# EAGLE board brd BEL RUMAH (EAGLE 7.5.0)
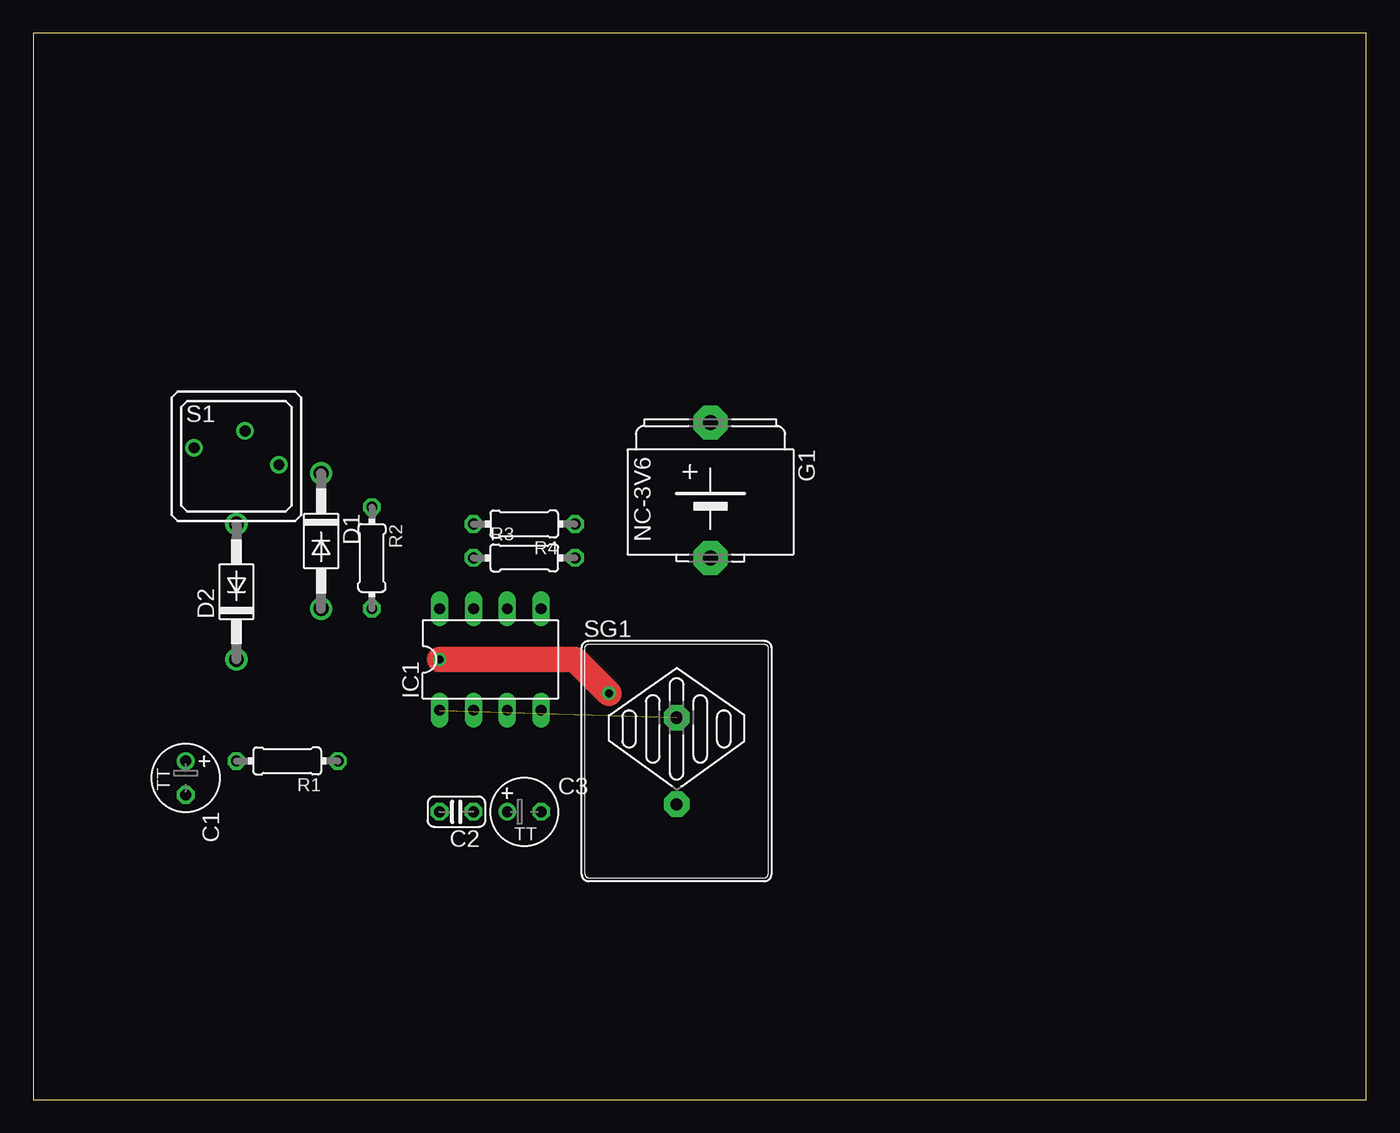
[diagram p0: board, top side]
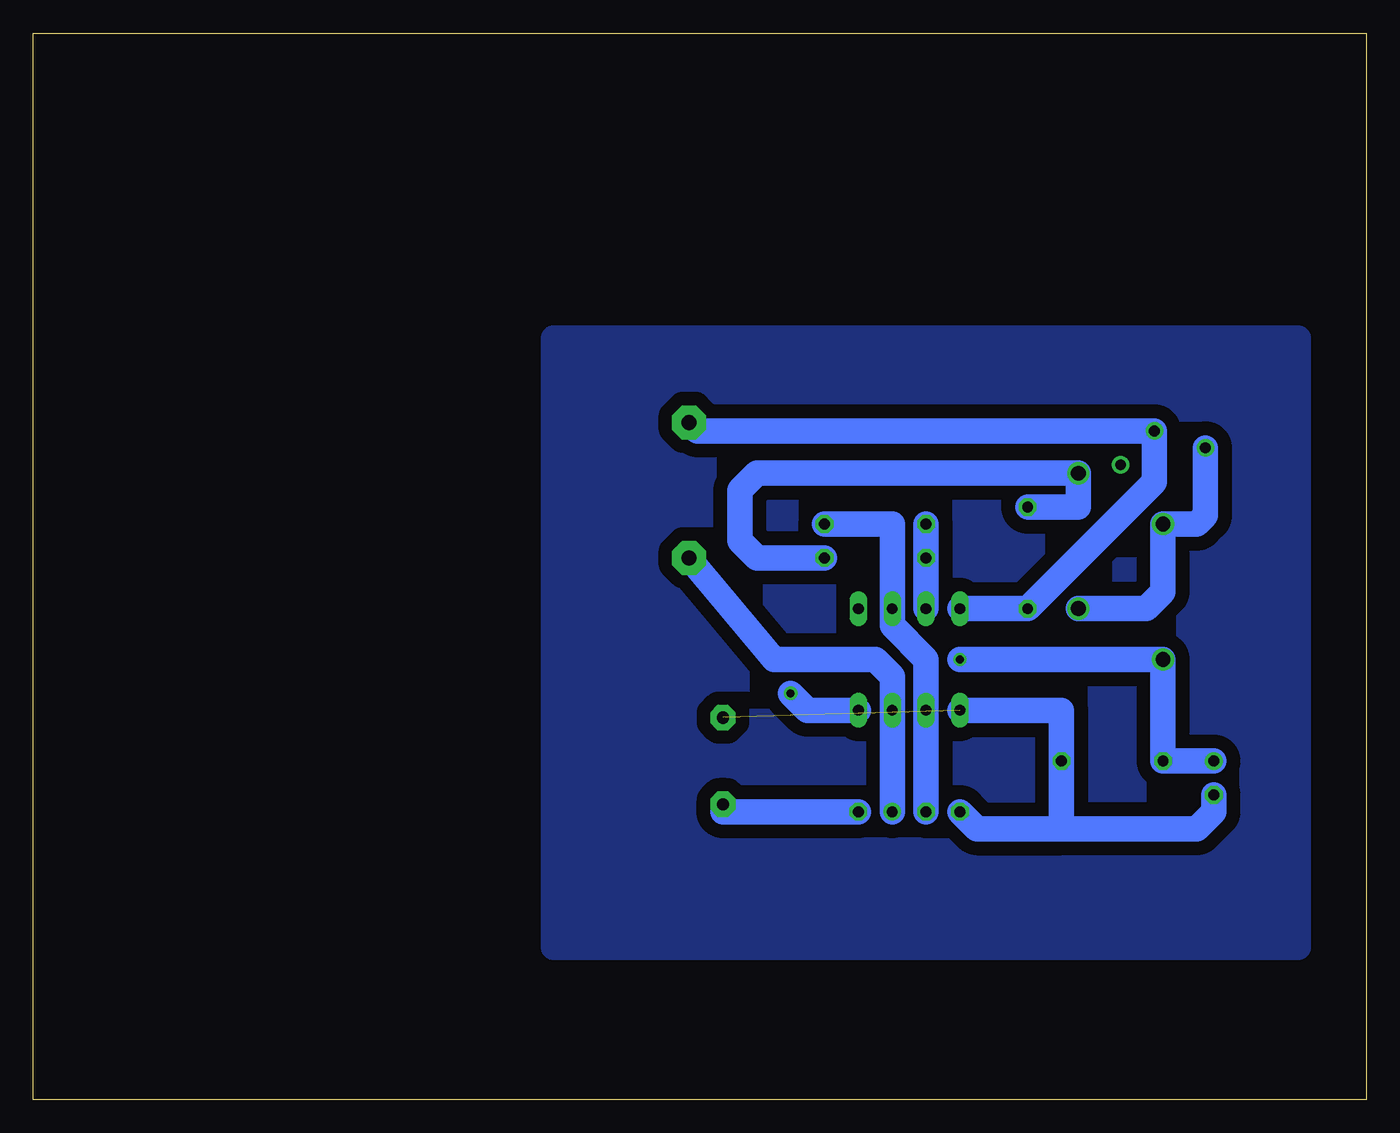
[diagram p1: board, bottom side, seen from below]

Size 100 x 80 mm. Coordinates in mm from the lower left corner, seen from the top.
Outline: 0,0 100,0 100,80 0,80 0,0
Copper layers (1*16): Top 0.035mm / dielectric 1.5mm / Bottom 0.035mm
Design rules "default *": minimum track width 10mil, minimum drill 24mil, track to track 40mil, track to pad 6mil, pad to pad 6mil, via to via 6mil, smd to smd 6mil, copper to edge 40mil, drill to drill 8mil, minimum pad ring 10mil, minimum via ring 8mil, stop-mask expansion 4mil, vias tented up to drill 0mil, thermal gap 10mil

## Footprints (pad centres in the part's own frame; a part is rotated, then mirrored left to right if it is on the bottom)
TT2D5 = drill 0.813: + -1.27,0 | drill 0.813 octagon: - 1.27,0
C025-024X044 = drill 0.813 octagon: 1 -1.27,0; 2 1.27,0
DO41-10 = drill 1.118: A 5.08,0; C -5.08,0
3V11R = drill 1.118 pad 2.54 octagon: + -5.08,0; - 5.08,0
DIL08 = drill 0.813 long: 1 -3.81,-3.81; 2 -1.27,-3.81; 3 1.27,-3.81; 4 3.81,-3.81; 5 3.81,3.81; 6 1.27,3.81; 7 -1.27,3.81; 8 -3.81,3.81
0204/7 = drill 0.813 octagon: 1 -3.81,0; 2 3.81,0
RDT1034 = drill 0.8: A 3.175,-0.635; A1 -3.175,0.635; B 0.65,1.9
F/SMX = drill 0.914 pad 1.905 octagon: 1 0,-3.251; 2 0,3.251

## Placement (x,y rotation side)
C1  4.7 uF  [TT2D5]  11.43,24.13 270 top
C2  22 nF  [C025-024X044]  31.75,21.59 180 top
C3  100uF  [TT2D5]  36.83,21.59 0 top
D1  1N4004  [DO41-10]  21.59,41.91 270 top
D2  1N4004  [DO41-10]  15.24,38.1 90 top
G1  9V  [3V11R]  50.8,45.72 270 top
IC1  555  [DIL08]  34.29,33.02 0 top
R1  33K  [0204/7]  19.05,25.4 180 top
R2  33K  [0204/7]  25.4,40.64 270 top
R3  33K  [0204/7]  36.83,40.64 0 top
R4  33K  [0204/7]  36.83,43.18 180 top
S1  RDT1034  [RDT1034]  15.24,48.26 0 top
SG1  F/SMX  [F/SMX]  48.26,25.4 0 top

## Library data of the parts
C1-C3 = rcl; SPICEPREFIX: C
D1 D2 = diode
G1 = battery
IC1 = ic-package
R1-R4 = rcl; SPICEPREFIX: R
S1 = switch
SG1 = buzzer; OC_FARNELL: unknown; OC_NEWARK: unknown

## Nets
N$1: G1.+ IC1.8 R2.2 S1.B
N$2: D1.A D2.A S1.A1
N$3: D1.C R2.1 R3.2
N$4: IC1.7 R3.1 R4.2
N$5: C1.+ D2.C IC1.4 R1.2
N$6: C1.- C2.2 IC1.1 R1.1 SG1.2
N$7: C2.1 IC1.2 IC1.6 R4.1
N$9: C3.- SG1.1
N$12: C3.+ G1.- IC1.3

## Tracks (layer width: path | path; a pad name or v marks a point on that pad's centre or on a via)
N$1
  Bottom 1.93: IC1.8 R2.2 15.89,46.34 S1.B 50.16,50.16 G1.+
N$2
  Bottom 1.93: S1.A1 12.06,43.81 12.7,43.18 D2.A 15.24,38.1 16.51,36.83 D1.A
N$3
  Bottom 1.93: R3.2 45.72,40.64 46.99,41.91 46.99,45.72 45.72,46.99 D1.C 21.59,44.45 R2.1
N$4
  Bottom 1.93: R4.2 R3.1 IC1.7
N$5  (via drill 0.6)
  Top 1.93: v43.18,30.48 40.64,33.02 v30.48,33.02
  Bottom 1.93: C1.+ R1.2 D2.C v30.48,33.02 | IC1.4 41.91,29.21 v43.18,30.48
N$6  (1 unrouted)
  Bottom 1.93: C1.- 11.43,21.59 12.7,20.32 22.86,20.32 | 22.86,20.32 R1.1 22.86,29.21 IC1.1 | C2.2 29.21,20.32 22.86,20.32
N$7
  Bottom 1.93: R4.1 35.56,43.18 IC1.6 35.56,35.56 33.02,33.02 IC1.2 C2.1
N$8
  pour Bottom: 5.08,57.15 60.96,57.15 60.96,11.43 5.08,11.43
  pour Bottom: 5.08,57.15 60.96,57.15 60.96,11.43 5.08,11.43
N$9
  Bottom 1.93: C3.- 48.26,21.59 SG1.1
N$12
  Bottom 1.93: G1.- 44.45,33.02 36.83,33.02 35.56,31.75 IC1.3 C3.+